# Altium PCB Railgun Control Board PCB Mk2.0.PcbDoc (part 2 of 2)
Units mm, origin at the board's own origin, x right, y up, seen from the top; angles counter-clockwise.
Board outline 60 x 60 mm, 4 copper layers (Top Layer, Layer 1, Layer 2, Bottom Layer), stack 1.312 mm thick; 103 components, 59 nets, 337 pads, 9 vias.
Unrouted connection lines stored in the file: 214.
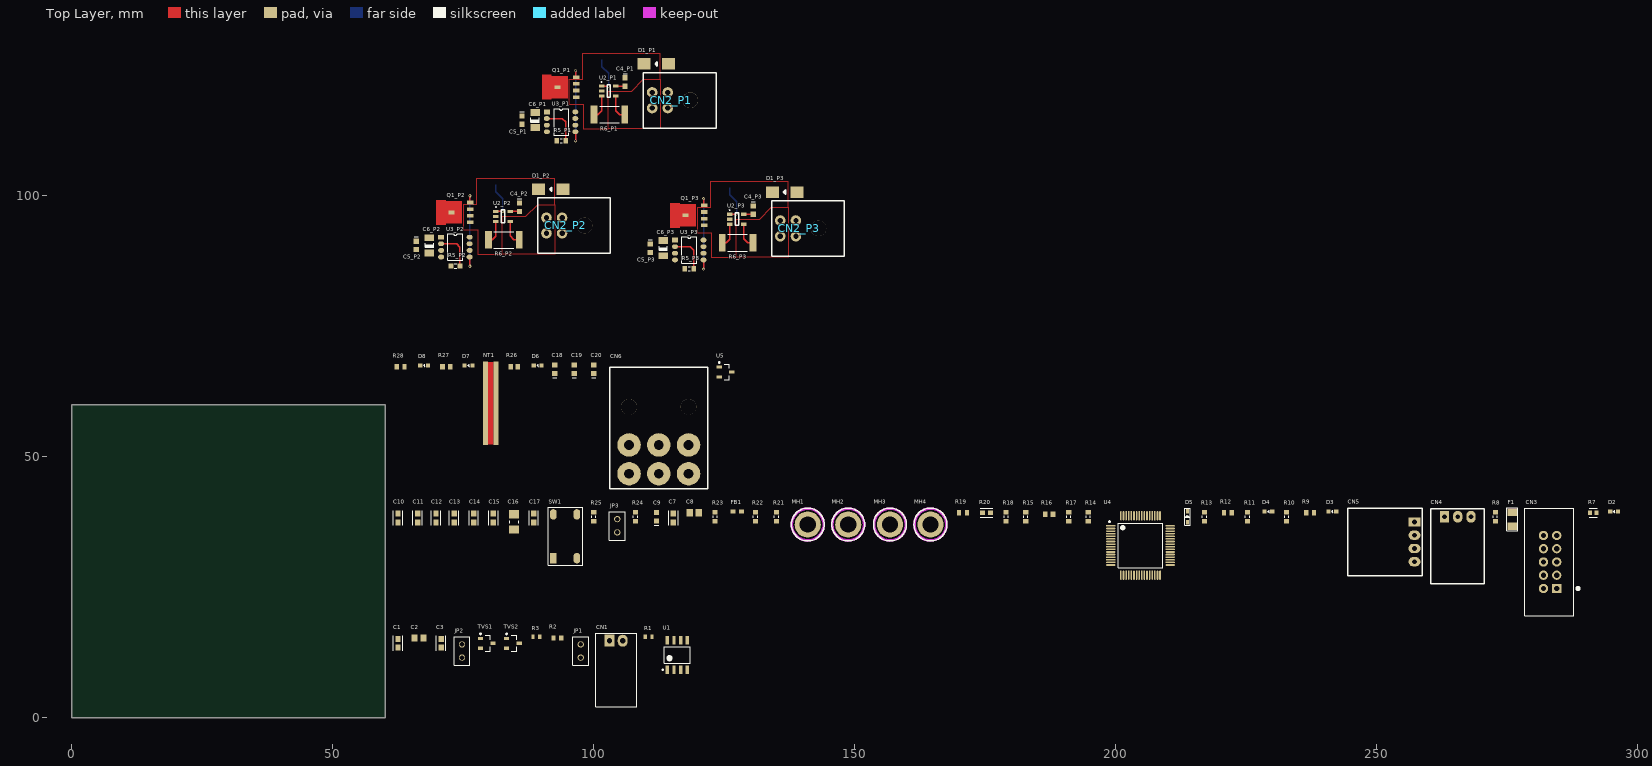
[diagram p0: Top Layer view]

## Polygon pours and split planes (outlines as drawn) (continued)
"Current Shunt In_P1" on Top Layer "CURRENT_SHUNT_IN_P1_L01_P002" (solid, remove dead copper, pour order 2): 107.25,120.05 109.5,122.3 112.75,122.3 112.75,127.25 97.75,127.25 97.75,122.25 95.25,122.25 95.25,117.5 98,117.5 98,112.8 102.75,112.8 102.75,120.05

## Text inside footprints (layer, text, board x,y; h text height)
FB1: Mechanical 6 "Land Pattern Adapted for Flow Soldering" at 126.5,40.1 h0.05